# EAGLE board mega_simplest_classboard_redux (EAGLE 6.5.0)
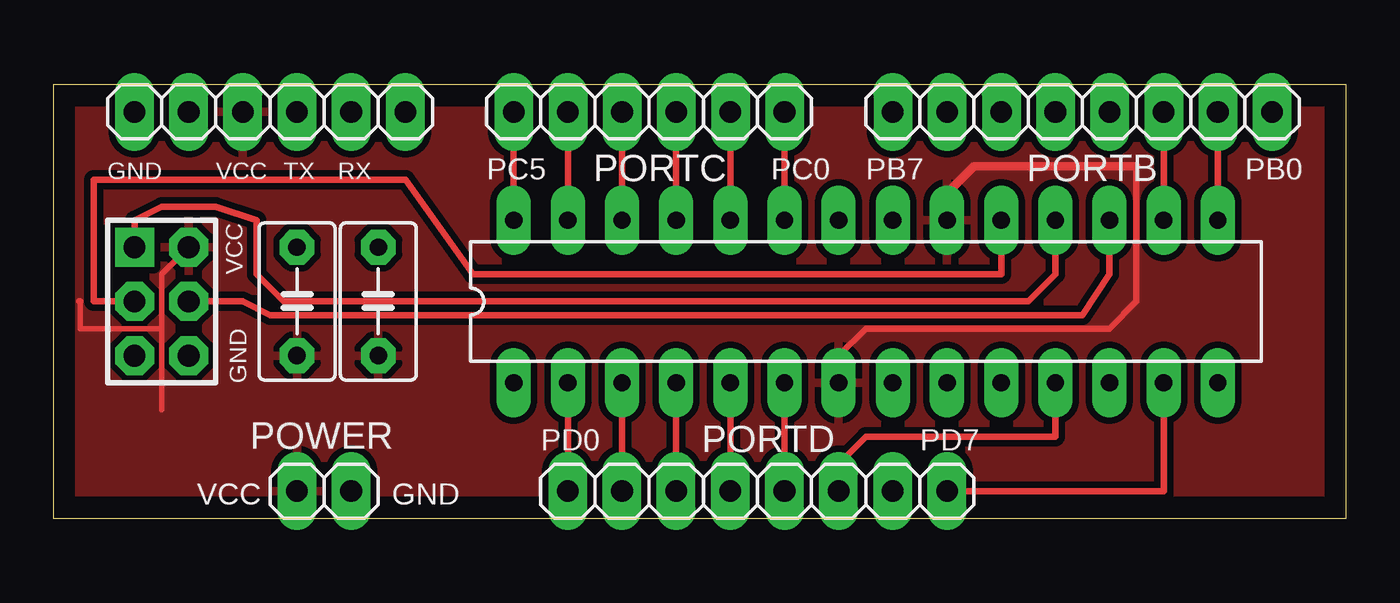
[diagram p0: board, top side]
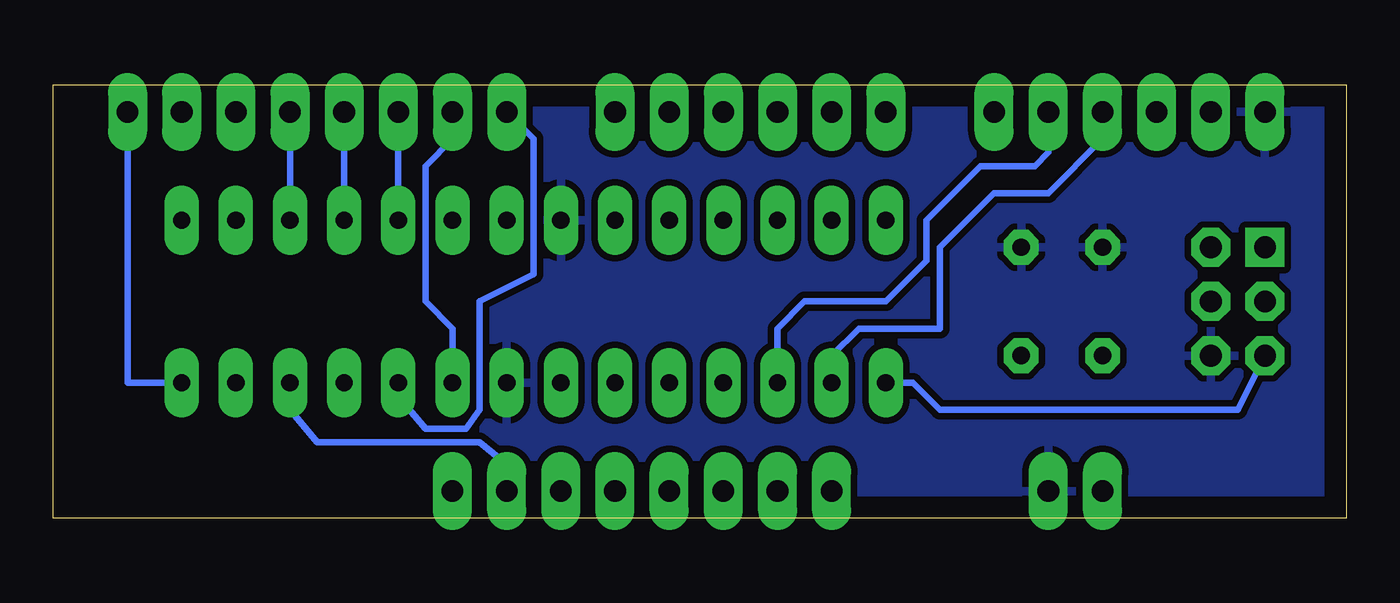
[diagram p1: board, bottom side, seen from below]

Size 60.63 x 20.31 mm. Coordinates in mm from the lower left corner, seen from the top.
Outline: 0,0 60.63,0 60.63,20.31 0,20.31 0,0
Copper layers (1*16): Top 0.035mm / dielectric 1.5mm / Bottom 0.035mm
Design rules "improved_12mil": minimum track width 12mil, minimum drill 0.8mm, track to track 12mil, track to pad 12mil, pad to pad 12mil, via to via 12mil, smd to smd 12mil, copper to edge 40mil, drill to drill 12mil, minimum pad ring 16mil, minimum via ring 16mil, stop-mask expansion 4mil, vias tented up to drill 0mil, thermal gap 12mil

## Footprints (pad centres in the part's own frame; a part is rotated, then mirrored left to right if it is on the bottom)
C5B3.5 = drill 0.813 pad 1.6 octagon: 1 -2.54,0; 2 2.54,0
1X06 = drill 1.016 long: 1 -6.35,0; 2 -3.81,0; 3 -1.27,0; 4 1.27,0; 5 3.81,0; 6 6.35,0
DIL28-3 = drill 0.813 long: 1 -16.51,-3.81; 2 -13.97,-3.81; 3 -11.43,-3.81; 4 -8.89,-3.81; 5 -6.35,-3.81; 6 -3.81,-3.81; 7 -1.27,-3.81; 8 1.27,-3.81; 9 3.81,-3.81; 10 6.35,-3.81; 11 8.89,-3.81; 12 11.43,-3.81; 13 13.97,-3.81; 14 16.51,-3.81; 15 16.51,3.81; 16 13.97,3.81; 17 11.43,3.81; 18 8.89,3.81; 19 6.35,3.81; 20 3.81,3.81; 21 1.27,3.81; 22 -1.27,3.81; 23 -3.81,3.81; 24 -6.35,3.81; 25 -8.89,3.81; 26 -11.43,3.81; 27 -13.97,3.81; 28 -16.51,3.81
AVR-ISP-6 = drill 1.016 square: 1 -2.54,-1.27 | drill 1.016 octagon: 2 -2.54,1.27; 3 0,-1.27; 4 0,1.27; 5 2.54,-1.27; 6 2.54,1.27
1X08 = drill 1.016 long: 1 -8.89,0; 2 -6.35,0; 3 -3.81,0; 4 -1.27,0; 5 1.27,0; 6 3.81,0; 7 6.35,0; 8 8.89,0
1X02 = drill 1.016 long: 1 -1.27,0; 2 1.27,0

## Placement (x,y rotation side)
BUFFER  1u  [C5B3.5]  15.24,10.16 90 top
BUFFER1  0.1u  [C5B3.5]  11.43,10.16 90 top
FTDISERIAL  [1X06]  10.16,19.05 0 top
IC1  MEGA8-P  [DIL28-3]  38.1,10.16 0 top
ISP  AVR-ISP-6  [AVR-ISP-6]  5.08,10.16 270 top
PORTB  B  [1X08]  48.26,19.05 180 top
PORTC  C  [1X06]  27.94,19.05 180 top
PORTD  D  [1X08]  33.02,1.27 0 top
POWER  [1X02]  12.7,1.27 0 top

## Library data of the parts
BUFFER BUFFER1 = capacitor-wima
FTDISERIAL PORTB PORTC PORTD POWER = pinhead
IC1 = atmel
ISP = atmel-1

## Nets
GND: BUFFER1.2 BUFFER.2 FTDISERIAL.1 IC1.8 IC1.22 ISP.6 POWER.2
N$2: IC1.1 ISP.5
PORTB0: IC1.14 PORTB.1
PORTB1: IC1.15 PORTB.2
PORTB2: IC1.16 PORTB.3
PORTB3: IC1.17 ISP.4 PORTB.4
PORTB4: IC1.18 ISP.1 PORTB.5
PORTB5: IC1.19 ISP.3 PORTB.6
PORTB6: IC1.9 PORTB.7
PORTB7: IC1.10 PORTB.8
PORTC0: IC1.23 PORTC.1
PORTC1: IC1.24 PORTC.2
PORTC2: IC1.25 PORTC.3
PORTC3: IC1.26 PORTC.4
PORTC4: IC1.27 PORTC.5
PORTC5: IC1.28 PORTC.6
PORTD0: FTDISERIAL.4 IC1.2 PORTD.1
PORTD1: FTDISERIAL.5 IC1.3 PORTD.2
PORTD2: IC1.4 PORTD.3
PORTD3: IC1.5 PORTD.4
PORTD4: IC1.6 PORTD.5
PORTD5: IC1.11 PORTD.6
PORTD6: IC1.12 PORTD.7
PORTD7: IC1.13 PORTD.8
VCC: BUFFER1.1 BUFFER.1 FTDISERIAL.3 IC1.7 IC1.20 ISP.2 POWER.1

## Tracks (layer width: path | path; a pad name or v marks a point on that pad's centre or on a via)
GND
  pour Bottom: -1.27,26.67 -1.27,-5.08 64.77,-5.08 64.77,26.67
N$2
  Bottom 0.305: ISP.5 5.08,5.08 19.05,5.08 20.32,6.35 IC1.1
PORTB0
  Bottom 0.305: IC1.14 57.15,6.35 PORTB.1
PORTB1
  Top 0.305: PORTB.2 IC1.15
PORTB2
  Top 0.305: PORTB.3 IC1.16
PORTB3
  Top 0.305: IC1.17 49.53,11.43 48.26,9.53 10.16,9.53 8.89,10.16 ISP.4
  Bottom 0.305: PORTB.4 IC1.17
PORTB4
  Top 0.305: IC1.18 46.99,11.43 45.72,10.16 10.79,10.16 9.53,11.43 9.53,13.97 7.62,14.61 5.08,14.61 3.81,13.97 ISP.1
  Bottom 0.305: PORTB.5 IC1.18
PORTB5
  Top 0.305: IC1.19 44.45,11.43 19.68,11.43 16.51,15.87 1.9,15.87 1.9,10.16 ISP.3
  Bottom 0.305: IC1.19 PORTB.6
PORTB6
  Bottom 0.305: PORTB.7 41.91,17.78 43.18,16.51 43.18,10.16 41.91,8.89 IC1.9
PORTB7
  Bottom 0.305: IC1.10 44.45,5.71 43.18,4.19 41.27,4.19 40.64,5.08 40.64,10.16 38.1,11.43 38.1,17.78 PORTB.8
PORTC0
  Top 0.305: PORTC.1 IC1.23
PORTC1
  Top 0.305: PORTC.2 IC1.24
PORTC2
  Top 0.305: PORTC.3 IC1.25
PORTC3
  Top 0.305: PORTC.4 IC1.26
PORTC4
  Top 0.305: PORTC.5 IC1.27
PORTC5
  Top 0.305: PORTC.6 IC1.28
PORTD0
  Top 0.305: PORTD.1 IC1.2
  Bottom 0.305: FTDISERIAL.4 11.43,17.78 13.97,15.24 16.51,15.24 19.05,12.7 19.05,8.89 22.86,8.89 24.13,7.62 IC1.2
PORTD1
  Top 0.305: PORTD.2 IC1.3
  Bottom 0.305: IC1.3 26.67,8.89 25.4,10.16 21.59,10.16 19.68,12.07 19.68,13.97 17.14,16.51 14.6,16.51 13.97,17.14 FTDISERIAL.5
PORTD2
  Top 0.305: PORTD.3 IC1.4
PORTD3
  Top 0.305: PORTD.4 IC1.5
PORTD4
  Top 0.305: PORTD.5 IC1.6
PORTD5
  Top 0.305: IC1.11 46.99,3.81 38.1,3.81 36.83,2.54 PORTD.6
PORTD6
  Bottom 0.305: IC1.12 49.53,5.08 48.26,3.56 40.64,3.56 39.37,2.54 PORTD.7
PORTD7
  Top 0.305: IC1.13 52.07,1.27 PORTD.8
VCC
  Top 0.254: 5.08,8.89 5.08,5.08 | 1.27,10.16 1.27,8.89 5.08,8.89 | 5.08,8.89 5.08,11.43 ISP.2
  Top 0.305: IC1.7 | 36.83,5.08 IC1.7 | 1.27,10.16 1.22,10.16 | ISP.2 6.4,12.65 | 50.8,16.51 50.8,10.16 49.53,8.89 38.1,8.89 36.83,7.62 IC1.7
  Top 0.406: IC1.20 41.91,15.24 43.18,16.51 50.8,16.51
  pour Top: -1.27,26.67 -1.27,-5.08 63.5,-5.08 63.5,26.67

## Text on the board
tNames: GND | VCC | TX | RX | PC5 | PC0 | PB7 | PB0 | VCC | GND | PD0 | PD7 | VCC | GND